# EAGLE board lv_power (EAGLE 6.6.0)
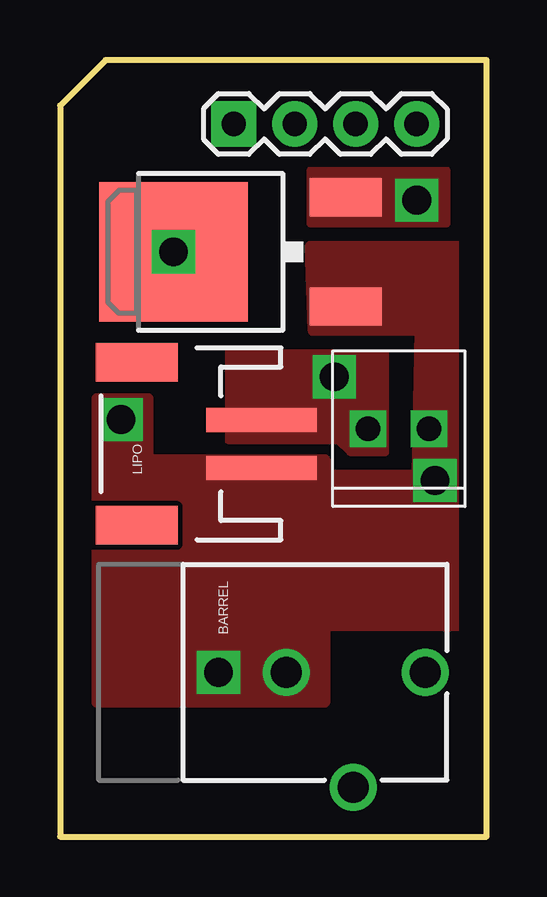
[diagram p0: board, top side]
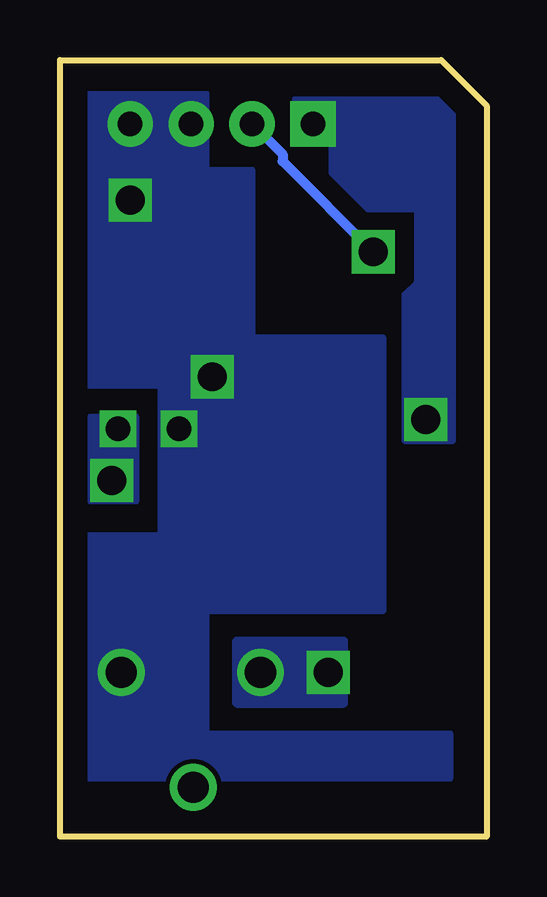
[diagram p1: board, bottom side, seen from below]

Size 17.78 x 32.38 mm. Coordinates in mm from the lower left corner, seen from the top.
Outline: 17.78,0 17.78,32.38 1.91,32.38 0,30.48 0,0 17.78,0
Copper layers (1*16): Top 0.035mm / dielectric 1.5mm / Bottom 0.035mm
Design rules "default": minimum track width 10mil, minimum drill 24mil, track to track 8mil, track to pad 8mil, pad to pad 8mil, via to via 8mil, smd to smd 8mil, copper to edge 40mil, drill to drill 8mil, minimum pad ring 10mil, minimum via ring 8mil, stop-mask expansion 4mil, vias tented up to drill 0mil, thermal gap 10mil

## Footprints (pad centres in the part's own frame; a part is rotated, then mirrored left to right if it is on the bottom)
V-REG_DPACK = smd 1.6 x 3: 1 -2.28,-4.8; 3 2.28,-4.8 | smd 5.8 x 6.2: 4 0,2.38
POWER_JACK_PTH_BREAD = drill 1.3: GND 0,7.9; GNDBREAK 4.8,10.7; PWR 0,13.7
JST-2-SMD = smd 1 x 4.6: 1 -1,-3.7; 2 1,-3.7 | smd 1.6 x 3.4: NC1 -3.4,1.5; NC2 3.4,1.5
1X04 = drill 1.016 pad 1.88 square: 1 0,0 | drill 1.016 pad 1.88: 2 2.54,0; 3 5.08,0; 4 7.62,0
1X02_2.54_SCREWTERM = drill 1.016 square: P1 2.54,0; P2 0,0

## Placement (x,y rotation side)
3V3REG  V_REG_317DPACK  [V-REG_DPACK]  7.11,24.38 90 top
BARREL  POWER_JACKPTH_BREAD  [POWER_JACK_PTH_BREAD]  1.52,6.86 270 top
LIPO  M02-JST-2MM-SMT  [JST-2-SMD]  4.7,16.38 90 top
OUT  [1X04]  7.24,29.72 0 top
SCREW  M022.54MM_SCREWTERM  [1X02_2.54_SCREWTERM]  15.37,17.02 180 top

## Library data of the parts
3V3REG = SparkFun-PowerIC
BARREL = SparkFun-Connectors; PROD_ID: PRT-10811
LIPO = SparkFun-Connectors; PROD_ID: CONN-08352
OUT SCREW = SparkFun-Connectors

## Nets
3V3: 3V3REG.4 OUT.2
GND: 3V3REG.1 BARREL.GND LIPO.1 OUT.1 SCREW.P2
VBAT: 3V3REG.3 BARREL.PWR LIPO.2 OUT.3 OUT.4 SCREW.P1

## Tracks (layer width: path | path; a pad name or v marks a point on that pad's centre or on a via)
3V3  (via drill 1.2)
  Top 0.406: 3V3REG.4 3.68,24.38 3.43,24.64
  Bottom 0.406: OUT.2 8.51,28.45 8.51,28.16 3V3REG.4
  other vias: 4.73,24.38
GND  (via drill 1.2)
  other vias: 6.6,6.86 2.54,17.4 15.62,14.86
  pour Top (no thermals): 11.05,5.59 1.52,5.59 1.52,18.29 3.68,18.29 3.68,15.75 11.05,15.75 11.05,15.11 14.86,15.11 14.99,21.08 10.54,21.08 10.41,24.64 16.76,24.64 16.76,8.76 11.05,8.76
  pour Bottom (no thermals): 5.97,8.13 10.41,8.13 10.41,5.59 5.97,5.59
  pour Bottom (no thermals): 3.43,16.51 1.4,16.51 1.4,30.73 8,30.73 8,29.21 6.48,29.21 6.48,27.69 4.95,26.16 2.92,26.16 2.92,23.11 3.43,22.61
  pour Bottom (no thermals): 16.51,13.97 16.51,17.53 14.61,17.53 14.61,13.97
VBAT  (via drill 1.2)
  other vias: 14.86,26.54 11.43,19.18
  pour Bottom (no thermals): 1.52,4.32 1.52,2.41 16.76,2.41 16.64,12.57 13.59,12.57 13.59,18.8 16.76,18.8 16.76,30.99 11.68,30.99 11.68,27.81 9.78,27.81 9.78,20.83 4.32,20.83 4.32,9.4 11.68,9.4 11.68,4.32
  pour Top (no thermals): 10.41,27.81 16.13,27.81 16.13,25.53 10.41,25.53
  pour Top (no thermals): 13.59,16 13.59,20.19 6.99,20.19 6.99,16.51 11.56,16.51 12.07,16